# EAGLE board OpenFocus (EAGLE 5.11)
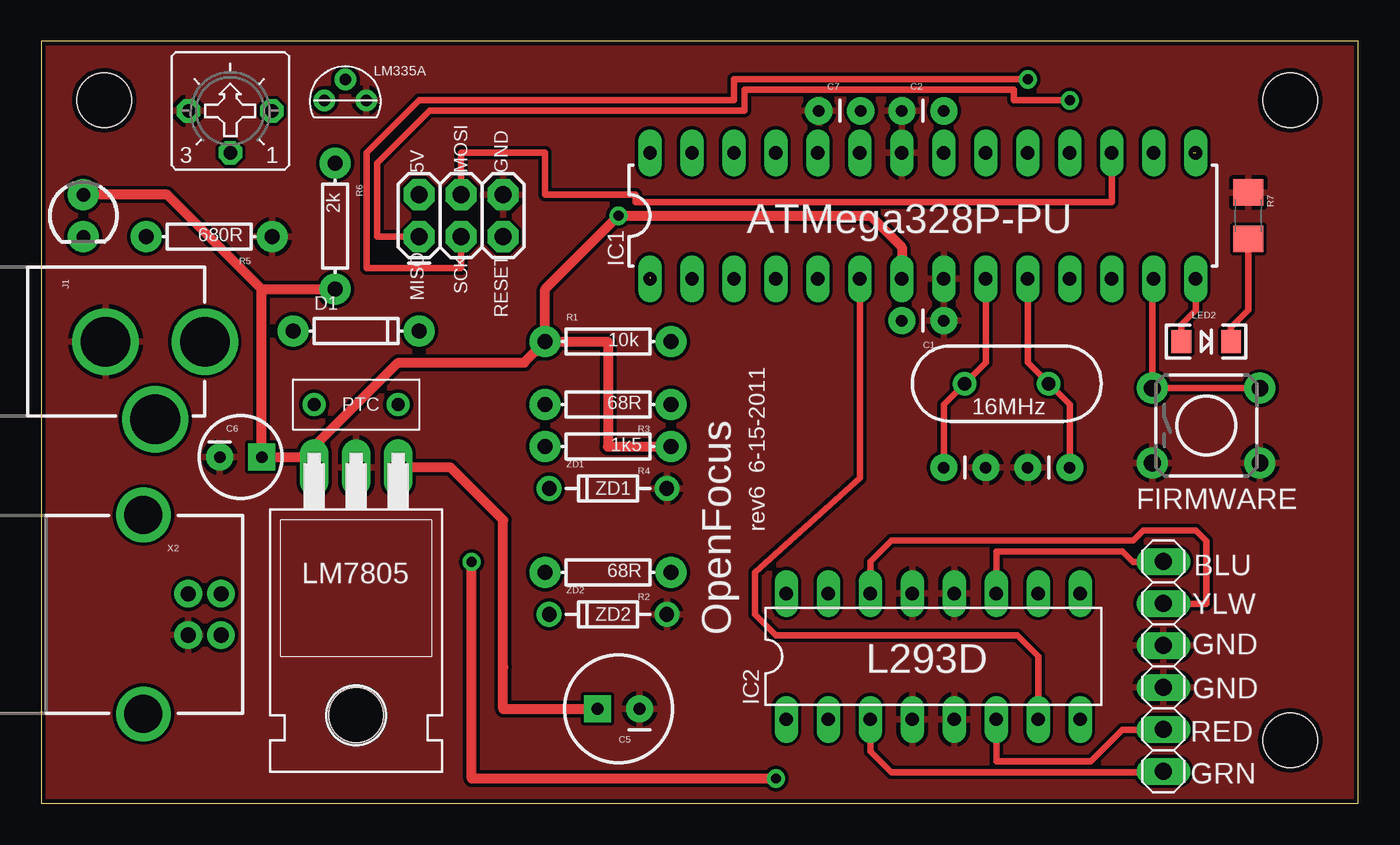
[diagram p0: board, top side]
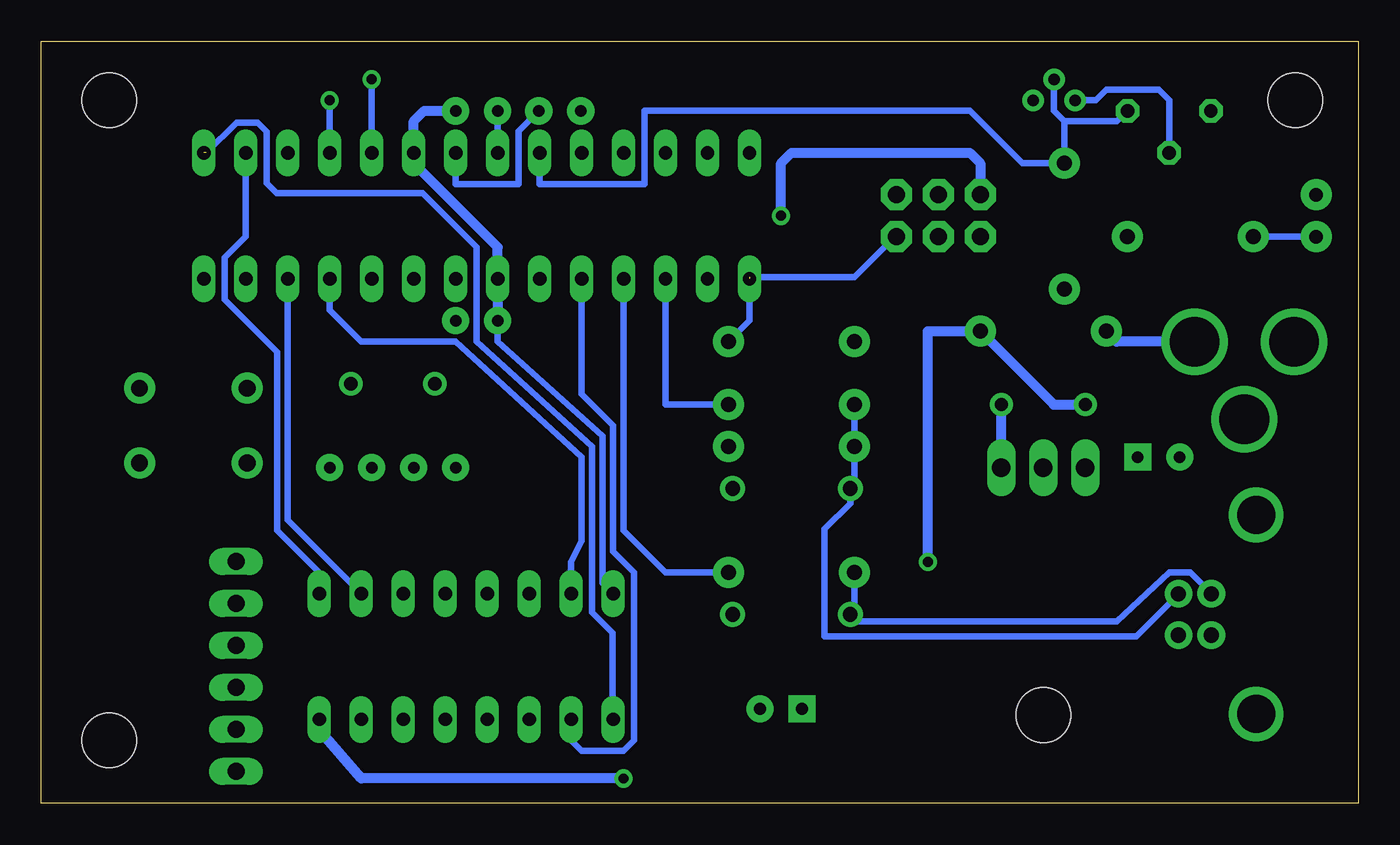
[diagram p1: board, bottom side, seen from below]

Size 79.68 x 46.12 mm. Coordinates in mm from the lower left corner, seen from the top.
Outline: 0,0 79.68,0 79.68,46.12 0,46.12 0,0
Copper layers (1*16): Top 0.035mm / dielectric 1.5mm / Bottom 0.035mm
Design rules "sparkfun": minimum track width 8mil, minimum drill 20mil, track to track 8mil, track to pad 8mil, pad to pad 8mil, via to via 8mil, smd to smd 8mil, copper to edge 10mil, drill to drill 8mil, minimum pad ring 12mil, minimum via ring 10mil, stop-mask expansion 4mil, vias tented up to drill 25mil, thermal gap 10mil

## Footprints (pad centres in the part's own frame; a part is rotated, then mirrored left to right if it is on the bottom)
CAP-PTH-SMALL = drill 0.7 pad 1.651 round: 1 0,0; 2 2.54,0
CPOL-RADIAL-100UF-25V = drill 0.7 pad 1.651 square: 1 1.27,0 | drill 0.7 pad 1.651 round: 2 -1.27,0
CPOL-RADIAL-10UF-25V = drill 0.7 pad 1.651 square: 1 1.27,0 | drill 0.7 pad 1.651 round: 2 -1.27,0
DIODE-1N4148 = drill 0.9 pad 1.88 round: A -3.81,0; C 3.81,0
PTC = drill 0.8 round: P$1 -2.54,0; P$2 2.54,0
TACTILE-PTH = drill 1.016 pad 1.88 round: 1 -3.251,2.261; 2 3.251,2.261; 3 -3.251,-2.261; 4 3.251,-2.261
DIL28-3 = drill 0.813 long: 1 -16.51,-3.81; 2 -13.97,-3.81; 3 -11.43,-3.81; 4 -8.89,-3.81; 5 -6.35,-3.81; 6 -3.81,-3.81; 7 -1.27,-3.81; 8 1.27,-3.81; 9 3.81,-3.81; 10 6.35,-3.81; 11 8.89,-3.81; 12 11.43,-3.81; 13 13.97,-3.81; 14 16.51,-3.81; 15 16.51,3.81; 16 13.97,3.81; 17 11.43,3.81; 18 8.89,3.81; 19 6.35,3.81; 20 3.81,3.81; 21 1.27,3.81; 22 -1.27,3.81; 23 -3.81,3.81; 24 -6.35,3.81; 25 -8.89,3.81; 26 -11.43,3.81; 27 -13.97,3.81; 28 -16.51,3.81
DIL16 = drill 0.813 long: 1 -8.89,-3.81; 2 -6.35,-3.81; 3 -3.81,-3.81; 4 -1.27,-3.81; 5 1.27,-3.81; 6 3.81,-3.81; 7 6.35,-3.81; 8 8.89,-3.81; 9 8.89,3.81; 10 6.35,3.81; 11 3.81,3.81; 12 1.27,3.81; 13 -1.27,3.81; 14 -3.81,3.81; 15 -6.35,3.81; 16 -8.89,3.81
TO220H = drill 1.118 long: 1 -2.54,-10.16; 2 0,-10.16; 3 2.54,-10.16 | hole 3.302: 0,4.826
POWER_JACK_PTH = drill 2.997 round: GND 0,7.7; GNDBREAK 4.7,10.7; PWR 0,13.7
2X3 = drill 1.016 pad 1.88 octagon: 1 0,0; 2 0,2.54; 3 2.54,0; 4 2.54,2.54; 5 5.08,0; 6 5.08,2.54
STAND-OFF = hole 3.302: 0,0
1X06 = drill 1.016 long: 1 -6.35,0; 2 -3.81,0; 3 -1.27,0; 4 1.27,0; 5 3.81,0; 6 6.35,0
LED3MM = drill 0.813 pad 1.88 round: A -1.27,0; K 1.27,0
LED-1206 = smd 1.2 x 1.4: A -1.5,0; C 1.5,0
HC49US = drill 0.813 round: 1 -2.54,0; 2 2.54,0
AXIAL-0.3 = drill 0.9 pad 1.88 round: P$1 -3.81,0; P$2 3.81,0
1206 = smd 1.6 x 1.8: 1 -1.4,0; 2 1.4,0
CT6 = drill 0.813 octagon: A 2.515,0; E -2.515,0; S 0,-2.54
TO-92-3 = drill 0.7 pad 1.27 round: + 0,1.27; - 1.27,0; ADJ -1.27,0
USB-B-PTH = drill 0.914 pad 1.676 round: D+ 0,1.25; D- 1.981,1.25; GND 0,-1.25; VBUS 1.981,-1.25 | drill 2.286 round: P$1 -2.718,-6.02; P$2 -2.718,6.02
DIODE-ZENER = drill 0.9 round: P$1 -3.556,0; P$2 3.556,0

## Placement (x,y rotation side)
C1  0.1 uF  [CAP-PTH-SMALL]  54.61,29.21 180 top
C2  0.1 uF  [CAP-PTH-SMALL]  52.07,41.91 0 top
C3  22 pF  [CAP-PTH-SMALL]  57.15,20.32 180 top
C4  22 pF  [CAP-PTH-SMALL]  59.69,20.32 0 top
C5  100uF  [CPOL-RADIAL-100UF-25V]  34.92,5.71 180 top
C6  10uF  [CPOL-RADIAL-10UF-25V]  12.06,20.96 0 top
C7  0.1 uF  [CAP-PTH-SMALL]  47.04,41.91 0 top
D1  [DIODE-1N4148]  19.05,28.57 0 top
F1  PTCPTH  [PTC]  19.05,24.13 0 top
FIRMWARE  [TACTILE-PTH]  70.48,22.86 0 top
IC1  AVR-MEGA8-PPTH  [DIL28-3]  53.34,35.56 0 top
IC2  L293D  [DIL16]  53.98,8.89 0 top
IC3  LM7805  [TO220H]  19.05,10.16 180 top
J1  POWER_JACKPTH  [POWER_JACK_PTH]  -3.81,27.94 270 top
J2  AVR_SPI_PRG_6PTH  [2X3]  22.86,34.29 0 top
JP2  STAND-OFF  [STAND-OFF]  75.56,42.54 0 top
JP3  STAND-OFF  [STAND-OFF]  75.56,3.81 0 top
JP4  STAND-OFF  [STAND-OFF]  3.81,42.54 0 top
JP5  [1X06]  67.89,8.28 270 top
LED1  [LED3MM]  2.54,35.56 270 top
LED2  [LED-1206]  70.48,27.94 0 top
Q1  16MHz  [HC49US]  58.42,25.4 180 top
R1  10k  [AXIAL-0.3]  34.29,27.94 0 top
R2  68R  [AXIAL-0.3]  34.29,13.97 180 top
R3  68R  [AXIAL-0.3]  34.29,24.13 180 top
R4  1k5  [AXIAL-0.3]  34.29,21.59 180 top
R5  680R  [AXIAL-0.3]  10.16,34.29 180 top
R6  2k  [AXIAL-0.3]  17.78,34.92 270 top
R7  680R  [1206]  73.03,35.56 270 top
R8  [CT6]  11.43,41.91 0 top
U$8  LM335A  [TO-92-3]  18.39,42.54 0 top
X2  USBPTH  [USB-B-PTH]  8.89,11.43 0 top
ZD1  DIODE-ZENERPTH  [DIODE-ZENER]  34.29,19.05 0 top
ZD2  DIODE-ZENERPTH  [DIODE-ZENER]  34.29,11.43 0 top

## Library data of the parts
C1-C7 D1 F1 FIRMWARE IC1 J1 J2 JP2-JP4 LED1 LED2 Q1 R1-R7 X2 ZD1 ZD2 = SparkFun
IC2 = st-microelectronics
IC3 = linear
JP5 = pinhead
R8 = pot
U$8 = EJH

## Nets
5V: C1.2 C2.2 C6.1 IC1.7 IC1.20 IC2.16 IC3.3 J2.2 LED1.A R1.P$1 R4.P$1 R6.P$2
12V: D1.C F1.P$1 IC2.8
BL_CONDITION: FIRMWARE.1 FIRMWARE.2 IC1.13
BL_INDICATOR: IC1.14 LED2.A
GND: C1.1 C2.1 C3.1 C4.1 C5.2 C6.2 C7.1 FIRMWARE.3 FIRMWARE.4 IC1.8 IC1.22 IC2.4 IC2.5 IC2.12 IC2.13 IC3.2 J1.GND J2.6 JP5.3 JP5.4 R5.P$1 R7.1 R8.E U$8.- X2.GND ZD1.P$2 ZD2.P$2
N$1: C7.2 IC1.21
N$2: IC1.23 R6.P$1 R8.A U$8.+
N$3: IC2.3 JP5.6
N$4: C3.2 IC1.9 Q1.2
N$5: C4.2 IC1.10 Q1.1
N$6: IC2.6 JP5.5
N$7: LED2.C R7.2
N$8: IC2.14 JP5.2
N$9: IC2.11 JP5.1
N$10: C5.1 F1.P$2 IC3.1
N$11: IC1.19 J2.3
N$12: R8.S U$8.ADJ
N$13: IC1.17 J2.4
N$14: R3.P$2 R4.P$2 X2.D- ZD1.P$1
N$15: R2.P$2 X2.D+ ZD2.P$1
N$16: IC1.3 R3.P$1
N$17: IC1.4 R2.P$1
N$18: IC1.18 J2.1
N$20: IC1.1 J2.5 R1.P$2
N$21: IC1.5 IC2.2
N$22: IC1.6 IC2.7
N$23: IC1.11 IC2.15
N$24: IC1.12 IC2.10
N$25: IC1.15 IC2.1
N$26: IC1.16 IC2.9
N$27: LED1.K R5.P$2
N$28: D1.A J1.PWR

## Tracks (layer width: path | path; a pad name or v marks a point on that pad's centre or on a via)
5V  (via drill 0.6)
  Top 0.61: R1.P$1 29.21,26.67 21.59,26.67 16.51,21.59 16.51,20.96 C6.1 13.34,31.11 | R1.P$1 30.48,31.11 v34.92,35.56 50.16,35.56 52.07,33.65 IC1.7 | R1.P$1 34.29,27.94 34.29,21.59 R4.P$1 | 13.34,31.11 R6.P$2 | 13.34,31.11 7.62,36.83 LED1.A
  Top 1.016: 16.51,20.96 IC3.3
  Bottom 0.406: IC2.16 45.72,13.34 45.72,22.23 52.07,27.94 C1.2
  Bottom 0.61: C1.2 IC1.7 52.07,33.65 57.15,38.73 IC1.20 57.15,41.27 56.52,41.91 C2.2 | J2.2 22.86,38.73 23.5,39.37 34.29,39.37 34.92,38.73 v34.92,35.56
12V  (via drill 0.6)
  Top 0.61: v44.45,1.5 26.04,1.5 v26.04,14.61
  Bottom 0.61: IC2.8 62.87,4.45 60.33,1.5 v44.45,1.5 | F1.P$1 18.41,24.13 D1.C 26.04,28.57 v26.04,14.61
BL_CONDITION
  Top 0.406: IC1.13 67.23,31.67 FIRMWARE.1 FIRMWARE.2
BL_INDICATOR
  Top 0.406: LED2.A 68.98,28.98 69.85,29.84 IC1.14
GND
  Bottom 0.406: IC1.22 C2.1
  pour Top: 0,46.35 80.01,46.35 80.01,0 0,0
N$1
  Bottom 0.406: IC1.21 54.61,37.46 50.8,37.46 50.8,40.69 C7.2
N$2
  Bottom 0.406: IC1.23 49.53,37.46 43.18,37.46 43.18,41.91 23.5,41.91 20.32,38.73 R6.P$1 17.78,41.27 | 17.78,41.27 18.41,41.91 18.41,43.79 U$8.+ | 17.78,41.27 14.61,41.27 R8.A
N$3
  Top 0.406: IC2.3 50.16,3.15 51.44,1.88 67.89,1.88 JP5.6 67.87,1.9
N$4
  Top 0.406: C3.2 54.61,24.13 Q1.2 57.15,26.67 IC1.9
N$5
  Top 0.406: C4.2 62.23,24.13 Q1.1 59.69,26.67 IC1.10
N$6
  Top 0.406: IC2.6 57.78,2.54 63.5,2.54 65.41,4.45 67.87,4.45 JP5.5
N$7
  Top 0.406: LED2.C 71.98,28.8 73.03,29.84 R7.2
N$8
  Top 0.406: IC2.14 50.16,14.63 51.44,15.9 66.06,15.9 66.67,16.51 69.85,16.51 70.48,15.88 70.48,12.07 67.92,12.07 JP5.2 67.89,12.19
N$9
  Top 0.406: IC2.11 57.78,15.24 65.41,15.24 66.04,14.61 67.87,14.61 JP5.1
N$10
  Top 0.61: C5.1 27.94,5.71 27.94,8.26 27.94,17.14 24.77,20.32 IC3.1
  Bottom 0.61: IC3.1 F1.P$2
N$11  (via drill 0.6)
  Top 0.406: v59.69,43.81 41.91,43.81 41.91,42.54 22.86,42.54 19.68,39.37 19.68,32.38 25.4,32.38 J2.3
  Bottom 0.406: v59.69,43.81 IC1.19
N$12
  Bottom 0.406: R8.S 11.43,42.54 12.06,43.18 15.24,43.18 15.88,42.54 U$8.ADJ
N$13
  Top 0.406: IC1.17 64.77,36.4 35.97,36.4 35.97,36.83 30.48,36.83 30.48,39.37 25.4,39.37 J2.4
N$14
  Bottom 0.406: X2.D- 10.97,12.55 13.41,10.11 32.31,10.11 32.31,16.61 32.28,16.61 30.73,18.16 ZD1.P$1 30.48,19.3 R4.P$2 R3.P$2
N$15
  Bottom 0.406: X2.D+ 8.94,12.75 10.16,13.97 11.43,13.97 14.61,11 30.3,11 ZD2.P$1 30.48,11.68 R2.P$2
N$16
  Bottom 0.406: IC1.3 41.91,24.13 R3.P$1
N$17
  Bottom 0.406: R2.P$1 41.91,13.97 44.45,16.51 IC1.4
N$18  (via drill 0.6)
  Top 0.406: v62.23,42.54 58.85,42.54 58.85,43.18 42.55,43.18 42.55,41.91 23.5,41.91 20.32,38.73 20.32,34.29 J2.1
  Bottom 0.406: v62.23,42.54 IC1.18
N$20  (1 unrouted)
  Bottom 0.406: J2.5 28.04,34.29 30.48,31.85 36.83,31.85 | R1.P$2 36.83,29.21 IC1.1
N$21
  Bottom 0.406: IC1.5 46.99,24.77 45.09,22.86 45.09,15.24 43.81,13.97 43.81,3.81 44.45,3.18 46.99,3.18 47.62,3.81 IC2.2
N$22
  Top 0.406: IC1.6 49.53,19.68 43.18,13.97 43.18,11.43 44.45,10.16 59.05,10.16 60.33,8.89 IC2.7
N$23
  Bottom 0.406: IC2.15 47.62,14.61 46.99,15.88 46.99,20.96 54.61,27.94 60.33,27.94 62.23,29.84 IC1.11
N$24
  Bottom 0.406: IC1.12 64.77,17.14 IC2.10
N$25  (1 unrouted)
  Bottom 0.406: 69.7,39.37 67.87,41.2 66.6,41.2 66.04,40.64 66.04,37.54 65.43,36.93 56.62,36.93 53.34,33.65 53.34,27.94 46.35,21.59 46.35,11.56 45.11,10.31 45.11,5.11 IC2.1
N$26
  Bottom 0.406: IC2.9 62.87,13.97 65.41,16.51 65.41,27.3 68.58,30.48 68.58,33.02 67.31,34.29 IC1.16
N$27
  Bottom 0.406: LED1.K R5.P$2
N$28
  Bottom 0.61: J1.PWR 14.61,27.94 D1.A

## Text on the board
tPlace: LM335A | 5V | MOSI | GND | ATMega328P-PU | MISO | SCK | RESET | PTC | 16MHz | ZD1 | rev6 6-15-2011 | BLU | YLW | ZD2 | OpenFocus | GND | L293D | GND | RED | GRN